# EAGLE board ADXL345_Breakout_V15panelize (EAGLE 6.5.0)
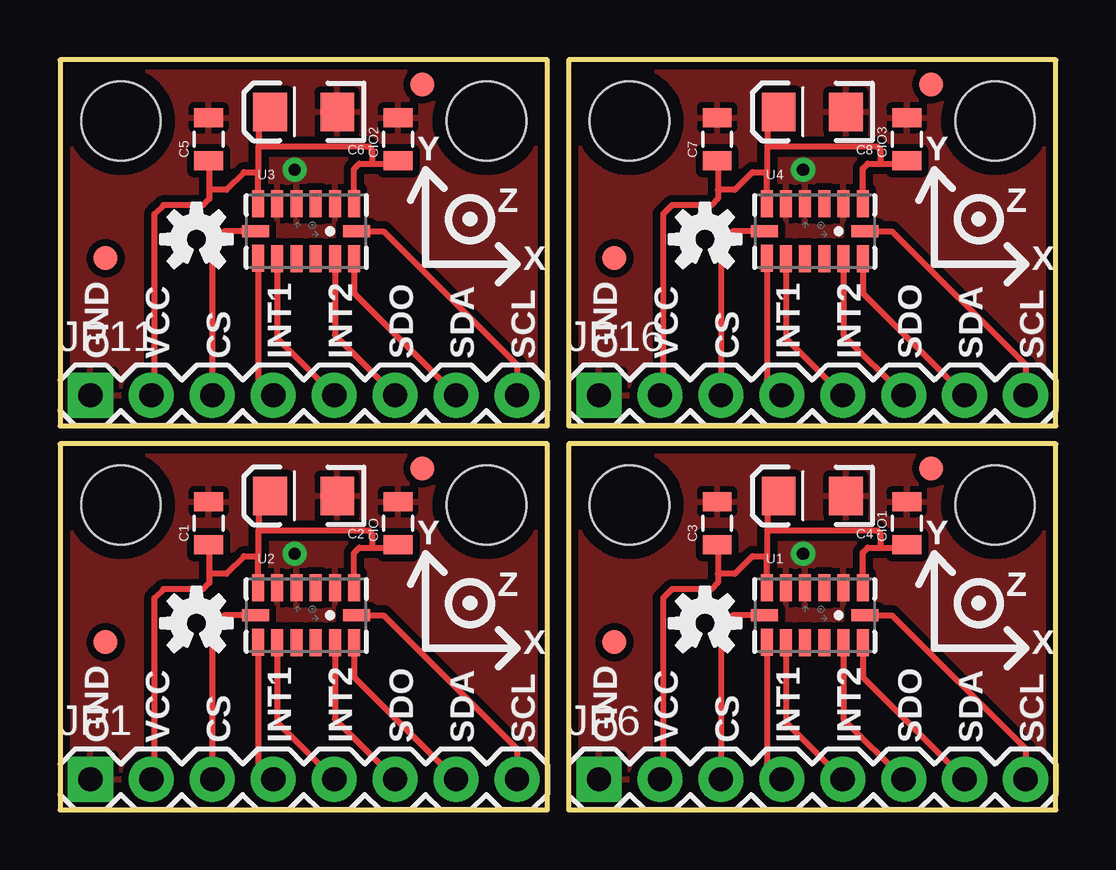
[diagram p0: board, top side]
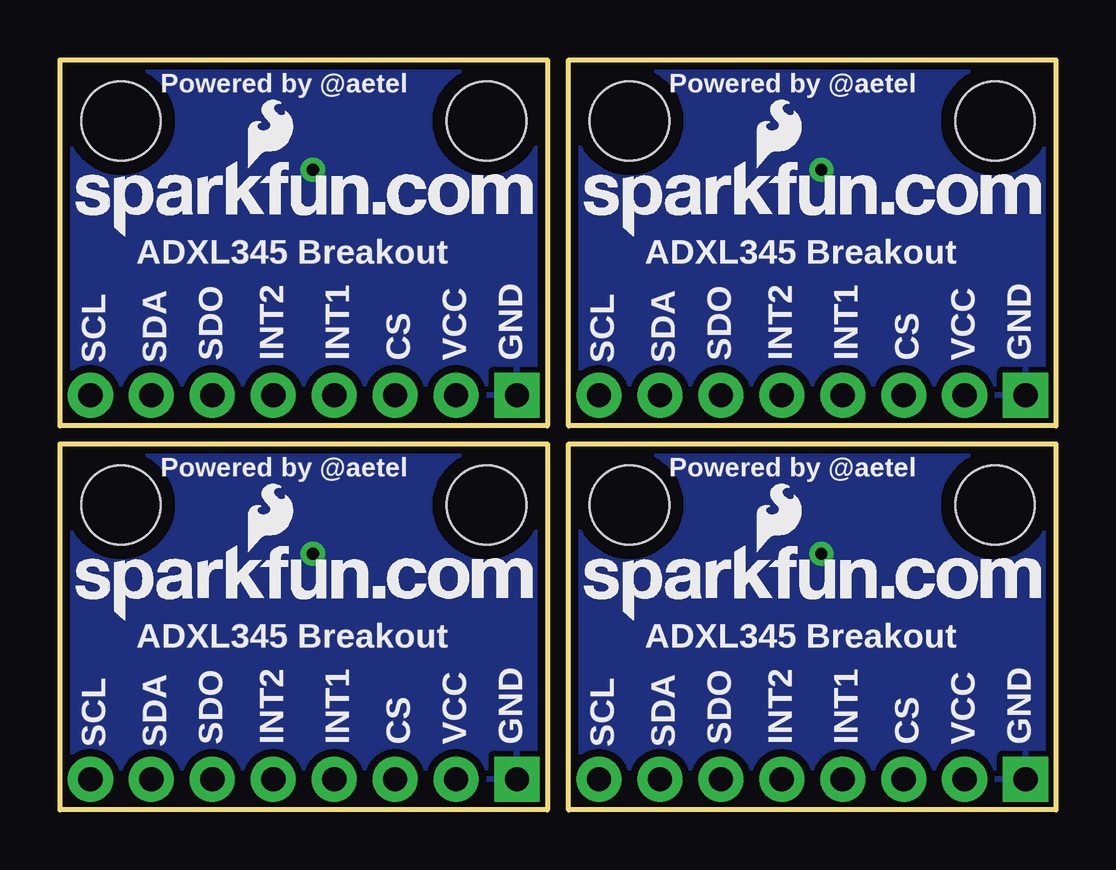
[diagram p1: board, bottom side, seen from below]

Size 41.52 x 31.24 mm. Coordinates in mm from the lower left corner, seen from the top.
Outline: 0,0 20.32,0 20.32,15.24 0,15.24 0,0
Outline: 21.2,0 41.52,0 41.52,15.24 21.2,15.24 21.2,0
Outline: 0,16 20.32,16 20.32,31.24 0,31.24 0,16
Outline: 21.2,16 41.52,16 41.52,31.24 21.2,31.24 21.2,16
Copper layers (1*16): Top 0.035mm / dielectric 1.5mm / Bottom 0.035mm
Design rules "SparkFun *": minimum track width 8mil, minimum drill 20mil, track to track 8mil, track to pad 8mil, pad to pad 8mil, via to via 8mil, smd to smd 8mil, copper to edge 8mil, drill to drill 8mil, minimum pad ring 12mil, minimum via ring 10mil, stop-mask expansion 4mil, vias tented up to drill 20mil, thermal gap 10mil
tRestrict: area 9.3,8.9 to 9.6,9.1; area 10.1,8.9 to 10.4,9.1; area 30.5,8.9 to 30.8,9.1; area 31.3,8.9 to 31.6,9.1; area 9.3,24.9 to 9.6,25.1; area 10.1,24.9 to 10.4,25.1; area 30.5,24.9 to 30.8,25.1; area 31.3,24.9 to 31.6,25.1

## Footprints (pad centres in the part's own frame; a part is rotated, then mirrored left to right if it is on the bottom)
0805 = smd 0.8 x 1.2: 1 -0.9,0; 2 0.9,0
EIA3216 = smd 1.4 x 1.6: A 1.4,0; C -1.4,0
1X08 = drill 1.016 pad 1.88 square: 1 0,0 | drill 1.016 pad 1.88: 2 2.54,0; 3 5.08,0; 4 7.62,0; 5 10.16,0; 6 12.7,0; 7 15.24,0; 8 17.78,0
STAND-OFF = hole 3.302: 0,0
FIDUCIAL-1X2 = smd 1 x 1: 1 0,0
LGA14_1:1_PATRICK = smd 0.5 x 1.124: 1 2,1.138; 2 1.2,1.138; 3 0.4,1.138; 4 -0.4,1.138; 5 -1.2,1.138; 6 -2,1.138; 8 -2,-1.13; 9 -1.2,-1.138; 10 -0.4,-1.138; 11 0.4,-1.138; 12 1.2,-1.138; 13 2,-1.138 | smd 1.124 x 0.5: 7 -2.1,0; 14 2.1,0

## Placement (x,y rotation side)
C1  0.1uF  [0805]  6.2,11.94 90 top
C2  10uF  [EIA3216]  10.16,13.08 180 top
C3  0.1uF  [0805]  27.4,11.94 90 top
C4  10uF  [EIA3216]  31.36,13.08 180 top
C5  0.1uF  [0805]  6.2,27.94 90 top
C6  10uF  [EIA3216]  10.16,29.08 180 top
C7  0.1uF  [0805]  27.4,27.94 90 top
C8  10uF  [EIA3216]  31.36,29.08 180 top
CIO  0.1uF  [0805]  14.1,11.94 90 top
CIO1  0.1uF  [0805]  35.3,11.94 90 top
CIO2  0.1uF  [0805]  14.1,27.94 90 top
CIO3  0.1uF  [0805]  35.3,27.94 90 top
JP1  [1X08]  1.27,1.27 0 top
JP2  STAND-OFF  [STAND-OFF]  2.54,12.7 0 top
JP3  STAND-OFF  [STAND-OFF]  17.78,12.7 0 top
JP4  FIDUCIAL1X2  [FIDUCIAL-1X2]  1.91,6.99 0 top
JP5  FIDUCIAL1X2  [FIDUCIAL-1X2]  15.11,14.22 0 top
JP6  [1X08]  22.47,1.27 0 top
JP7  STAND-OFF  [STAND-OFF]  23.74,12.7 0 top
JP8  STAND-OFF  [STAND-OFF]  38.98,12.7 0 top
JP9  FIDUCIAL1X2  [FIDUCIAL-1X2]  23.11,6.99 0 top
JP10  FIDUCIAL1X2  [FIDUCIAL-1X2]  36.31,14.22 0 top
JP11  [1X08]  1.27,17.27 0 top
JP12  STAND-OFF  [STAND-OFF]  2.54,28.7 0 top
JP13  STAND-OFF  [STAND-OFF]  17.78,28.7 0 top
JP14  FIDUCIAL1X2  [FIDUCIAL-1X2]  1.91,22.98 0 top
JP15  FIDUCIAL1X2  [FIDUCIAL-1X2]  15.11,30.22 0 top
JP16  [1X08]  22.47,17.27 0 top
JP17  STAND-OFF  [STAND-OFF]  23.74,28.7 0 top
JP18  STAND-OFF  [STAND-OFF]  38.98,28.7 0 top
JP19  FIDUCIAL1X2  [FIDUCIAL-1X2]  23.11,22.98 0 top
JP20  FIDUCIAL1X2  [FIDUCIAL-1X2]  36.31,30.22 0 top
U1  ADXL345PATRICK  [LGA14_1:1_PATRICK]  31.46,8.1 0 top
U2  ADXL345PATRICK  [LGA14_1:1_PATRICK]  10.26,8.1 0 top
U3  ADXL345PATRICK  [LGA14_1:1_PATRICK]  10.26,24.1 0 top
U4  ADXL345PATRICK  [LGA14_1:1_PATRICK]  31.46,24.1 0 top
U$1  LOGO-SFENEW  [SFE-NEW-WEBLOGO]  40.88,7.87 0 bottom
U$2  LOGO-SFENEW  [SFE-NEW-WEBLOGO]  19.68,7.87 0 bottom
U$3  OSHW-LOGOS  [OSHW-LOGO-S]  5.69,7.77 0 top
U$4  OSHW-LOGOS  [OSHW-LOGO-S]  26.89,7.77 0 top
U$5  LOGO-SFENEW  [SFE-NEW-WEBLOGO]  19.68,23.87 0 bottom
U$6  OSHW-LOGOS  [OSHW-LOGO-S]  5.69,23.77 0 top
U$7  LOGO-SFENEW  [SFE-NEW-WEBLOGO]  40.88,23.87 0 bottom
U$8  OSHW-LOGOS  [OSHW-LOGO-S]  26.89,23.77 0 top

## Library data of the parts
C1-C8 CIO CIO1-CIO3 JP1-JP3 JP6-JP8 JP11-JP13 JP16-JP18 U$1 U$2 U$5 U$7 = SparkFun
JP4 JP5 JP9 JP10 JP14 JP15 JP19 JP20 U$3 U$4 U$6 U$8 = SparkFun-Aesthetics
U1-U4 = Testing

## Nets
CS: JP1.3 U2.7
CS1: JP6.3 U1.7
CS2: JP11.3 U3.7
CS3: JP16.3 U4.7
GND: C1.2 C2.C CIO.2 JP1.1 U2.2 U2.4 U2.5
GND1: C3.2 C4.C CIO1.2 JP6.1 U1.2 U1.4 U1.5
GND2: C5.2 C6.C CIO2.2 JP11.1 U3.2 U3.4 U3.5
GND3: C7.2 C8.C CIO3.2 JP16.1 U4.2 U4.4 U4.5
INT1: JP1.4 U2.8
INT2: JP1.5 U2.9
INT3: JP6.5 U1.9
INT4: JP6.4 U1.8
INT5: JP11.5 U3.9
INT6: JP11.4 U3.8
INT7: JP16.5 U4.9
INT8: JP16.4 U4.8
SCL: JP1.8 U2.14
SCL1: JP6.8 U1.14
SCL2: JP11.8 U3.14
SCL3: JP16.8 U4.14
SDA: JP1.7 U2.13
SDA1: JP6.7 U1.13
SDA2: JP11.7 U3.13
SDA3: JP16.7 U4.13
SDO: JP1.6 U2.12
SDO1: JP6.6 U1.12
SDO2: JP11.6 U3.12
SDO3: JP16.6 U4.12
VCC: C1.1 C2.A CIO.1 JP1.2 U2.1 U2.6
VCC1: C3.1 C4.A CIO1.1 JP6.2 U1.1 U1.6
VCC2: C5.1 C6.A CIO2.1 JP11.2 U3.1 U3.6
VCC3: C7.1 C8.A CIO3.1 JP16.2 U4.1 U4.6

## Tracks (layer width: path | path; a pad name or v marks a point on that pad's centre or on a via)
CS
  Top 0.254: U2.7 6.83,8.1 6.35,7.62 JP1.3
CS1
  Top 0.254: U1.7 28.03,8.1 27.55,7.62 JP6.3
CS2
  Top 0.254: U3.7 6.83,24.1 6.35,23.62 JP11.3
CS3
  Top 0.254: U4.7 28.03,24.1 27.55,23.62 JP16.3
GND  (via drill 0.51)
  other vias: 9.78,10.67
  pour Top (isolate 0.305): 0,0 0,15.24 20.32,15.24 20.32,0
  pour Bottom (isolate 0.305): 0,0 0,15.24 20.32,15.24 20.32,0
GND1  (via drill 0.51)
  other vias: 30.98,10.67
  pour Top (isolate 0.305): 21.2,0 21.2,15.24 41.52,15.24 41.52,0
  pour Bottom (isolate 0.305): 21.2,0 21.2,15.24 41.52,15.24 41.52,0
GND2  (via drill 0.51)
  other vias: 9.78,26.67
  pour Top (isolate 0.305): 0,16 0,31.24 20.32,31.24 20.32,16
  pour Bottom (isolate 0.305): 0,16 0,31.24 20.32,31.24 20.32,16
GND3  (via drill 0.51)
  other vias: 30.98,26.67
  pour Top (isolate 0.305): 21.2,16 21.2,31.24 41.52,31.24 41.52,16
  pour Bottom (isolate 0.305): 21.2,16 21.2,31.24 41.52,31.24 41.52,16
INT1
  Top 0.254: U2.8 8.26,1.9 JP1.4
INT2
  Top 0.254: U2.9 9.06,3.64 JP1.5
INT3
  Top 0.254: U1.9 30.26,3.64 JP6.5
INT4
  Top 0.254: U1.8 29.46,1.9 JP6.4
INT5
  Top 0.254: U3.9 9.06,19.64 JP11.5
INT6
  Top 0.254: U3.8 8.26,17.9 JP11.4
INT7
  Top 0.254: U4.9 30.26,19.64 JP16.5
INT8
  Top 0.254: U4.8 29.46,17.9 JP16.4
SCL
  Top 0.254: JP1.8 19.05,2.54 13.49,8.1 U2.14
SCL1
  Top 0.254: JP6.8 40.25,2.54 34.69,8.1 U1.14
SCL2
  Top 0.254: JP11.8 19.05,18.54 13.49,24.1 U3.14
SCL3
  Top 0.254: JP16.8 40.25,18.54 34.69,24.1 U4.14
SDA
  Top 0.254: U2.13 12.26,5.52 JP1.7
SDA1
  Top 0.254: U1.13 33.46,5.52 JP6.7
SDA2
  Top 0.254: U3.13 12.26,21.52 JP11.7
SDA3
  Top 0.254: U4.13 33.46,21.52 JP16.7
SDO
  Top 0.254: U2.12 11.46,3.78 JP1.6
SDO1
  Top 0.254: U1.12 32.66,3.78 JP6.6
SDO2
  Top 0.254: U3.12 11.46,19.78 JP11.6
SDO3
  Top 0.254: U4.12 32.66,19.78 JP16.6
VCC
  Top 0.254: 8.28,11.63 12.88,11.63 13.01,11.51 13.01,10.92 | 8.28,10.54 8.28,11.63 | 8.28,10.54 8.26,10.57 7.67,10.57 6.93,9.83 6.22,9.83 | U2.1 12.26,10.71 12.47,10.92 13.01,10.92 | 13.01,10.92 13.93,10.92 CIO.1 | U2.6 8.26,10.52 8.28,10.54 | C2.A 8.28,13.08 8.28,11.63 | JP1.2 3.94,1.4 3.94,8.81 4.32,9.2 5.97,9.2 6.22,9.45 6.22,9.83 | C1.1 6.22,11.06 6.22,9.83
VCC1
  Top 0.254: 29.48,11.63 34.08,11.63 34.2,11.51 34.2,10.92 | 29.48,10.54 29.48,11.63 | 29.48,10.54 29.45,10.57 28.87,10.57 28.13,9.83 27.42,9.83 | U1.1 33.46,10.71 33.67,10.92 34.2,10.92 | 34.2,10.92 35.13,10.92 CIO1.1 | U1.6 29.46,10.52 29.48,10.54 | C4.A 29.48,13.08 29.48,11.63 | JP6.2 25.14,1.4 25.14,8.81 25.52,9.2 27.17,9.2 27.42,9.45 27.42,9.83 | C3.1 27.42,11.06 27.42,9.83
VCC2
  Top 0.254: 8.28,27.63 12.88,27.63 13.01,27.51 13.01,26.92 | 8.28,26.54 8.28,27.63 | 8.28,26.54 8.26,26.57 7.67,26.57 6.93,25.83 6.22,25.83 | U3.1 12.26,26.71 12.47,26.92 13.01,26.92 | 13.01,26.92 13.93,26.92 CIO2.1 | U3.6 8.26,26.52 8.28,26.54 | C6.A 8.28,29.08 8.28,27.63 | JP11.2 3.94,17.4 3.94,24.81 4.32,25.2 5.97,25.2 6.22,25.45 6.22,25.83 | C5.1 6.22,27.06 6.22,25.83
VCC3
  Top 0.254: 29.48,27.63 34.08,27.63 34.2,27.51 34.2,26.92 | 29.48,26.54 29.48,27.63 | 29.48,26.54 29.45,26.57 28.87,26.57 28.13,25.83 27.42,25.83 | U4.1 33.46,26.71 33.67,26.92 34.2,26.92 | 34.2,26.92 35.13,26.92 CIO3.1 | U4.6 29.46,26.52 29.48,26.54 | C8.A 29.48,29.08 29.48,27.63 | JP16.2 25.14,17.4 25.14,24.81 25.52,25.2 27.17,25.2 27.42,25.45 27.42,25.83 | C7.1 27.42,27.06 27.42,25.83

## Text on the board
tPlace: Y | Y | Z | Z | X | X | GND | VCC | CS | INT1 | INT2 | SDO | SDA | SCL | GND | VCC | CS | INT1 | INT2 | SDO | SDA | SCL | Y | Y | Z | Z | X | X | GND | VCC | CS | INT1 | INT2 | SDO | SDA | SCL | GND | VCC | CS | INT1 | INT2 | SDO | SDA | SCL
bPlace: Powered by @aetel | Powered by @aetel | ADXL345 Breakout | ADXL345 Breakout | GND | VCC | CS | INT1 | INT2 | SDO | SDA | SCL | GND | VCC | CS | INT1 | INT2 | SDO | SDA | SCL | Powered by @aetel | Powered by @aetel | ADXL345 Breakout | ADXL345 Breakout | GND | VCC | CS | INT1 | INT2 | SDO | SDA | SCL | GND | VCC | CS | INT1 | INT2 | SDO | SDA | SCL